# Altium PCB PCB3.PcbDoc
Units mil, origin at the board's own origin, x right, y up, seen from the top; angles counter-clockwise.
Board outline 6299.21 x 3937.01 mil, 2 copper layers (Top Layer, Bottom Layer); 132 components, 60 nets, 370 pads, 0 vias.
Unrouted connection lines stored in the file: 188.
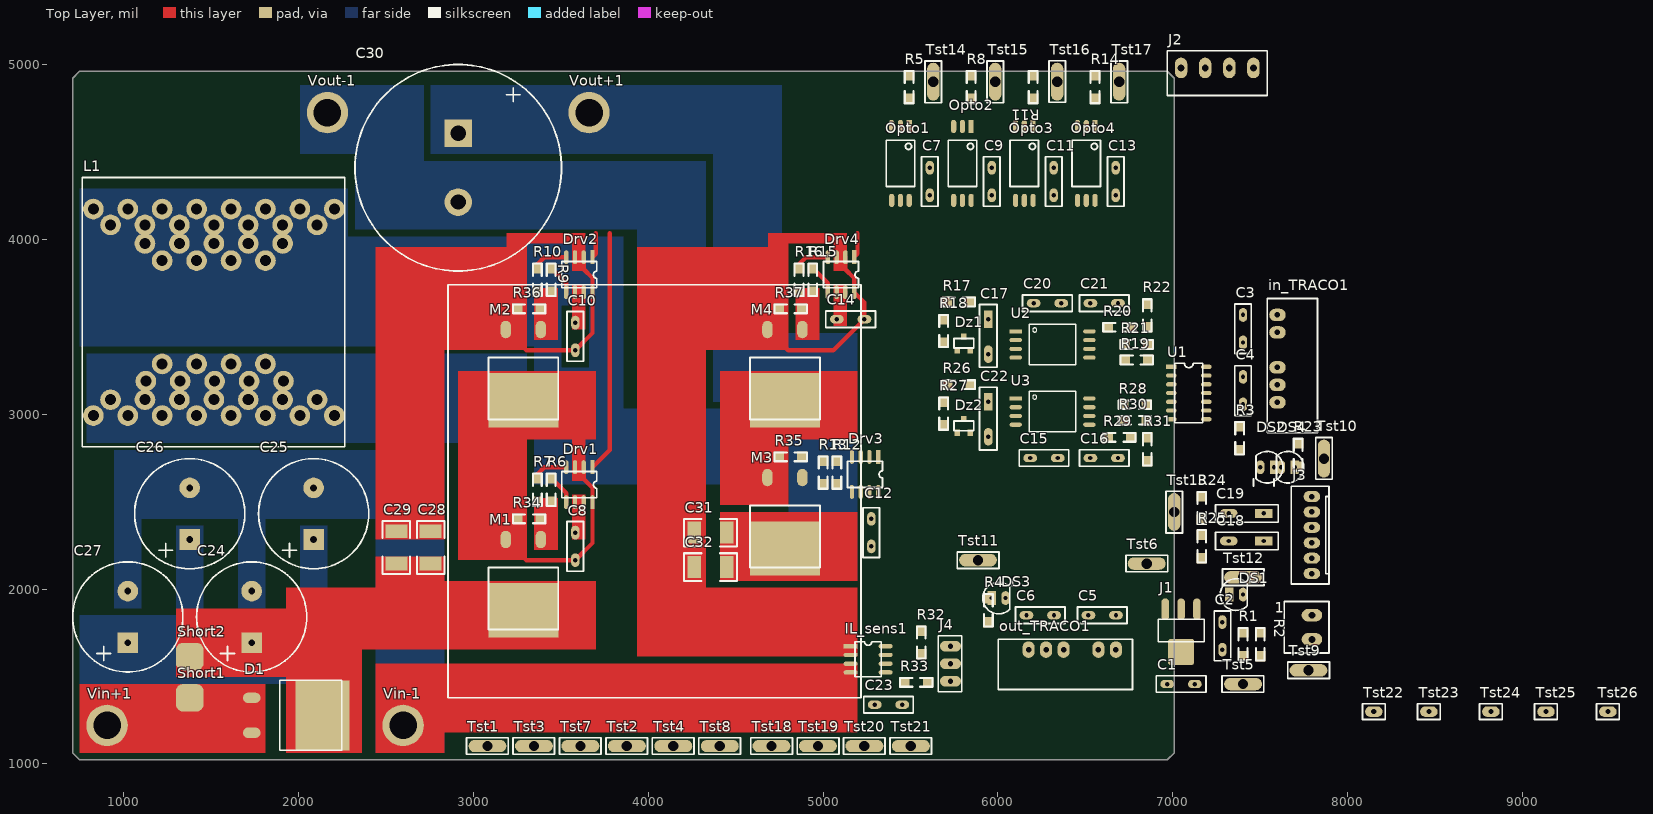
[diagram p0: Top Layer view]
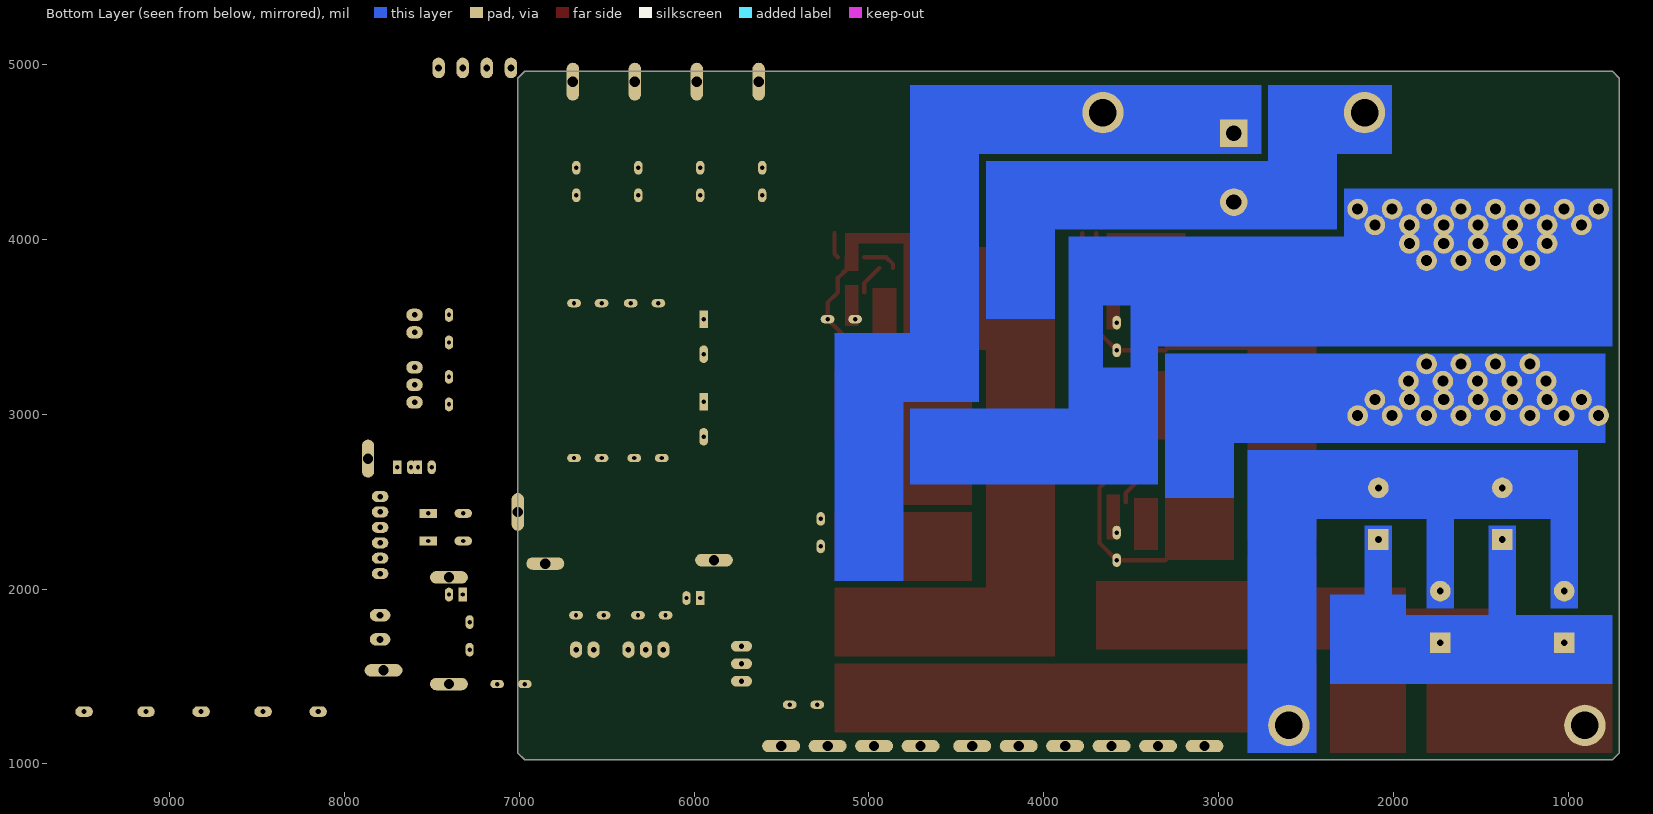
[diagram p1: Bottom Layer view, seen from below]

## Layer stack, top to bottom
Top Solder: solder mask 0.4, Solder Resist, Dk 3.5
Top Layer: signal copper 1.4
Dielectric 1: dielectric 12.6, FR-4, Dk 4.8
Bottom Layer: signal copper 1.4
Bottom Solder: solder mask 0.4, Solder Resist, Dk 3.5

## Board outline
708.66,4921.26 748.03,4960.63 6968.5,4960.63 7007.87,4921.26 7007.87,1062.99 6968.5,1023.62 748.03,1023.62 708.66,1062.99

## Design rules (kind name [scope] priority, off if disabled: settings)
Clearance "Polygon Pour" [InPolygon] p1: gap=78.74
Clearance Defoult [InNet('No Net') And OnLayer('Top Layer')] p2: gap=10
PolygonConnect [All] p1: connectstyle=Relief reliefconductorwidth=7.87 reliefentries=4 polygonreliefangle="90 Angle" airgapwidth=10
RoutingVias [All] p1: holewidth=28 width=50 viastyle="Through Hole" minholewidth=28 minwidth=50 maxholewidth=28 maxwidth=50
SolderMaskExpansion [All] p1: expansion=4
Width [All] p1: maxlimit=393.7 minlimit=11.81 preferedwidth=23.62
30 further rules are at their usual default settings.

## Classes and differential pairs
component class Switches: C24 C25 C26 C28 C29 C30 C31 C32 D1 L1 M1 M2 M3 M4 R34 R35 R36 R37 Short1 Short2 Vin+1 Vin-1 Vout+1 Vout-1
component class Power_supplies: 1 C1 C2 C3 C4 C5 C6 DS1 DS2 DS3 in_TRACO1 J1 out_TRACO1 R1 R2 R3 R4 Tst1 Tst2 Tst3 Tst4 Tst5 Tst6 Tst7 Tst8 Tst9 Tst10 Tst11 Tst12 Tst13
component class Drivers: C7 C8 C9 C10 C11 C12 C13 C14 C? Drv1 Drv2 Drv3 Drv4 IC? J2 Opto1 Opto2 Opto3 Opto4 R5 R6 R7 R8 R9 R10 R11 R12 R13 R14 R15 R16 Tst14 Tst15 Tst16 Tst17 Tst18 Tst19 Tst20 Tst21
component class Signal_processing: B? C15 C16 C17 C18 C19 C20 C21 C22 C23 DS4 Dz1 Dz2 IL_sens1 J3 J4 R17 R18 R19 R20 R21 R22 R23 R24 R25 R26 R27 R28 R29 R30 R31 R32 R33 Tst22 Tst23 Tst24 Tst25 Tst26 U1 U2 U3 U?

## Components (designator, comment, footprint, x,y, rotation, side; value= is the part's Value field where it differs from the comment)
1 "Cleva 2 vias" "CON2_EXTRON _3.5MMPITCH" 7795.28,1850.39 r270 top
C1 "100nF" CAP100NF_AAU 7125.98,1456.69 r180 top
C2 "100nF" CAP100NF_AAU 7283.46,1653.54 r90 top
C3 "100nF" CAP100NF_AAU 7401.57,3410.24 r90 top
C4 "100nF" CAP100NF_AAU 7401.57,3055.91 r90 top
C5 "100nF" CAP100NF_AAU 6517.32,1850.39 r0 top
C6 "100nF" CAP100NF_AAU 6162.99,1850.39 r0 top
C7 "100nF" CAP100NF_AAU 5610.24,4251.97 r90 top
C8 "100nF" CAP100NF_AAU 3582.68,2165.35 r90 top
C9 "100nF" CAP100NF_AAU 5964.57,4251.97 r90 top
C10 "100nF" CAP100NF_AAU 3582.68,3366.14 r90 top
C11 "100nF" CAP100NF_AAU 6318.9,4251.97 r90 top
C12 "100nF" CAP100NF_AAU 5275.59,2244.09 r90 top
C13 "100nF" CAP100NF_AAU 6673.23,4251.97 r90 top
C14 "100nF" CAP100NF_AAU 5236.22,3543.31 r180 top
C15 "100nF" CAP100NF_AAU 6341.73,2749.21 r180 top
C16 "100nF" CAP100NF_AAU 6686.22,2749.21 r180 top
C17 "66nF" "CONDENSADOR_MKP_200MILIS - DUPLICATE" 5944.88,3543.31 r270 top
C18 "4.7nF" "CONDENSADOR_MKP_200MILIS - DUPLICATE" 7519.69,2275.2 r180 top
C19 "470pF" "CONDENSADOR_MKP_200MILIS - DUPLICATE" 7519.69,2432.68 r180 top
C20 "100nF" CAP100NF_AAU 6361.42,3635.04 r180 top
C21 "100nF" CAP100NF_AAU 6686.22,3635.04 r180 top
C22 "27nF" "CONDENSADOR_MKP_200MILIS - DUPLICATE" 5944.88,3070.87 r270 top
C23 "100nF" CAP100NF_AAU 5452.76,1338.58 r180 top
C24 "470µF" CE_16DX35MM_PITCH7.5MM 1732.28,1692.91 r90 top
C25 "470µF" CE_16DX35MM_PITCH7.5MM 2086.61,2283.46 r90 top
C26 "470µF" CE_16DX35MM_PITCH7.5MM 1377.95,2283.46 r90 top
C27 "470µF" CE_16DX35MM_PITCH7.5MM 1023.62,1692.91 r90 top
C28 "100nF" 1812 2755.91,2145.67 r90 top
C29 "1uF" 1812 2559.06,2145.67 r90 top
C30 "820µF" CE_30DX35MM_PITCH10MM 2913.39,4606.3 r270 top
C31 "100nF" 1812 4448.82,2322.83 r180 top
C32 "1uF" 1812 4448.82,2125.98 r180 top
D1 "????" "D2PAK - DIODE" 1732.28,1377.95 r270 top
Drv1 "NCP81074A" NCP81074A 3681.1,2696.85 r270 top
Drv2 "NCP81074A" NCP81074A 3681.1,3897.64 r270 top
Drv3 "NCP81074A" NCP81074A 5314.96,2755.91 r270 top
Drv4 "NCP81074A" NCP81074A 5177.17,3897.64 r270 top
DS1 "Verde" "LED 2MM" 7401.57,1968.5 r270 top
DS2 "Verde" "LED 2MM" 7500,2696.85 r90 top
DS3 "Verde" "LED 2MM" 6043.31,1948.82 r270 top
DS4 "Verde" "LED 2MM" 7618.11,2696.85 r90 top
Dz1 "4.7V" "SOT23 - ZENNER" 5767.72,3366.14 r0 top
Dz2 "4.7V" "SOT23 - ZENNER" 5767.72,2893.7 r0 top
IL_sens1 "ACS723LLCTR-20AB-T" SOIC8_GND 5157.48,1673.23 r0 top
in_TRACO1 "TRACO" TRACO_TMA1212S 7598.43,3567.72 r270 top
J1 "LD1117" SOT-223_LM1117 7047.24,1762.44 r180 top
J2 "CON4" "CON4_EXTRON _3.5MMPITCH" 7047.24,4980.31 r0 top
J3 "CON6" ? 7795.28,2088.19 r90 top
J4 "Cleva 2 vias" CON_3_100MILIS 5728.35,1673.23 r0 top
L1 "mH" GENERAL_E_COIL 826.77,2992.13 r90 top
M1 "MOSFET N" "D2PAK - MOSFET" 3385.83,2283.46 r180 top
M2 "MOSFET N" "D2PAK - MOSFET" 3385.83,3484.25 r180 top
M3 "MOSFET N" "D2PAK - MOSFET" 4881.89,2637.8 r180 top
M4 "MOSFET N" "D2PAK - MOSFET" 4881.89,3484.25 r180 top
Opto1 "ACPL-W70L" SSOIC6 5492.13,4645.67 r270 top
Opto2 "ACPL-W70L" SSOIC6 5846.46,4645.67 r270 top
Opto3 "ACPL-W70L" SSOIC6 6200.79,4645.67 r270 top
Opto4 "ACPL-W70L" SSOIC6 6555.12,4645.67 r270 top
out_TRACO1 "TRACO" TRACO_TMA1212S 6674.8,1653.54 r180 top
R1 "RK" 1206 7401.57,1751.97 r270 top
R2 "Res. Bridge" 1206 7500,1751.97 r270 top
R3 "RK" 1206 7381.89,2795.28 r90 top
R4 "RK" 1206 5944.88,1811.02 r90 top
R5 "560OHM" 1206 5492.13,4803.15 r90 top
R6 "25" 1206 3444.88,2500 r90 top
R7 "560OHM" 1206 3366.14,2500 r90 top
R8 "560OHM" 1206 5846.46,4803.15 r90 top
R9 "560OHM" 1206 3444.88,3700.79 r90 top
R10 "560OHM" 1206 3366.14,3700.79 r90 top
R11 "560OHM" 1206 6200.79,4803.15 r90 top
R12 "560OHM" 1206 5078.74,2598.43 r90 top
R13 "560OHM" 1206 5000,2598.43 r90 top
R14 "560OHM" 1206 6555.12,4803.15 r90 top
R15 "560OHM" 1206 4940.94,3700.79 r90 top
R16 "560OHM" 1206 4862.2,3700.79 r90 top
R17 "47k" 1206 5708.66,3641.73 r0 top
R18 "2k" 1206 5688.98,3543.31 r270 top
R19 "11k" 1206 6725.59,3310.24 r0 top
R20 "11k" 1206 6627.17,3497.24 r0 top
R21 "27k" 1206 6860.43,3398.82 r180 top
R22 "27k" 1206 6853.54,3497.24 r90 top
R23 "RK" 1206 7716.54,2834.65 r270 top
R24 "6k8" 1206 7165.35,2531.1 r270 top
R25 "680k" 1206 7165.35,2176.77 r90 top
R26 "120k" 1206 5708.66,3169.29 r0 top
R27 "2k" 1206 5688.98,3070.87 r270 top
R28 "11k" 1206 6715.75,3054.33 r0 top
R29 "11k" 1206 6627.17,2867.32 r0 top
R30 "27k" 1206 6850.59,2965.75 r180 top
R31 "27k" 1206 6853.54,2867.32 r270 top
R32 "10k" 1206 5561.02,1761.81 r270 top
R33 "10k" 1206 5600.39,1466.54 r180 top
R34 "68K" 1206 3385.83,2401.57 r180 top
R35 "68K" 1206 4881.89,2755.91 r180 top
R36 "68K" 1206 3385.83,3602.36 r180 top
R37 "68K" 1206 4881.89,3602.36 r180 top
Short1 "CON1" SHORTPAD 1377.95,1377.95 r90 top
Short2 "CON1" SHORTPAD 1377.95,1614.17 r90 top
Tst1 "Test Point" TEST_POINT 3080.71,1102.36 r90 top
Tst2 "Test Point" TEST_POINT 3877.95,1102.36 r90 top
Tst3 "Test Point" TEST_POINT 3346.46,1102.36 r90 top
Tst4 "Test Point" TEST_POINT 4143.7,1102.36 r90 top
Tst5 "Test Point" TEST_POINT 7401.57,1456.69 r90 top
Tst6 "Test Point" TEST_POINT 6850.39,2145.67 r270 top
Tst7 "Test Point" TEST_POINT 3612.2,1102.36 r90 top
Tst8 "Test Point" TEST_POINT 4409.45,1102.36 r90 top
Tst9 "Test Point" TEST_POINT 7775.59,1535.43 r270 top
Tst10 "Test Point" TEST_POINT 7864.17,2746.06 r0 top
Tst11 "Test Point" TEST_POINT 5885.83,2165.35 r270 top
Tst12 "Test Point" TEST_POINT 7401.57,2066.93 r270 top
Tst13 "Test Point" TEST_POINT 7007.87,2440.94 r180 top
Tst14 "Test Point" TEST_POINT 5629.92,4901.57 r180 top
Tst15 "Test Point" TEST_POINT 5984.25,4901.57 r180 top
Tst16 "Test Point" TEST_POINT 6338.58,4901.57 r0 top
Tst17 "Test Point" TEST_POINT 6692.91,4901.57 r180 top
Tst18 "Test Point" TEST_POINT 4704.72,1102.36 r270 top
Tst19 "Test Point" TEST_POINT 4970.47,1102.36 r270 top
Tst20 "Test Point" TEST_POINT 5236.22,1102.36 r90 top
Tst21 "Test Point" TEST_POINT 5501.97,1102.36 r90 top
Tst22 "Test Point" CON_1_VIA 8149.61,1299.21 r90 top
Tst23 "Test Point" CON_1_VIA 8464.57,1299.21 r90 top
Tst24 "Test Point" CON_1_VIA 8818.9,1299.21 r90 top
Tst25 "Test Point" CON_1_VIA 9133.86,1299.21 r90 top
Tst26 "Test Point" CON_1_VIA 9488.19,1299.21 r90 top
U1 "LMC6484IM" SOIC_14 6991.34,3270.87 r0 top
U2 "ACPL-C870-000E" SSOP8 6312.2,3398.82 r0 top
U3 "ACPL-C870-000E" SSOP8 6312.2,3014.96 r0 top
Vin+1 "CON1" POWERHOLE 905.51,1220.47 r0 top
Vin-1 "CON1" POWERHOLE 2598.43,1220.47 r0 top
Vout+1 "CON1" POWERHOLE 3661.42,4724.41 r0 top
Vout-1 "CON1" POWERHOLE 2165.35,4724.41 r0 top

## Footprints (in the part's own frame and the unit in brackets; to place one, negate y for a bottom-side part, rotate by r counter-clockwise, add the part's x,y. Pads: shape width x height; smd on the part's side, far side on the other; paste and mask are expansions set on the pad)
1206 [mil] "SMD R&C"
  rect 60x60 smd: 1(0,0) 2(135,0)
  silkscreen extent -25,-25 160,25, body extent 2,-31 128,31
1812 [mm]
  rect 2x3.2 smd: 1(0,0) 2(4.7,0)
  silkscreen extent -1.5,-2 6.2,2
CAP100NF_AAU [mm] "10nF 1600v"
  oval 2x1.2 hole 0.635: 1(0,0) 2(4,0)
  silkscreen extent -1.6,-1.2 5.6,1.2
CE_16DX35MM_PITCH7.5MM [mm]
  rect 3x3 hole 1: 1(0,0)
  round 3 hole 1: 2(7.5,0)
  silkscreen extent -4.25,-8 11.75,8
CE_30DX35MM_PITCH10MM [mm]
  rect 4x4 hole 2.2: 1(0,0)
  round 4 hole 2.2: 2(10,0)
  silkscreen extent -10,-15 20,15
"CON2_EXTRON _3.5MMPITCH" [mm]
  oval 1.8x3 hole 1: 1(0,0) 2(3.5,0)
  silkscreen extent -2,-4 5.5,2.5
"CON4_EXTRON _3.5MMPITCH" [mm]
  oval 1.8x3 hole 1: 1(0,0) 2(3.5,0) 3(7,0) 4(10.5,0)
  silkscreen extent -2,-4 12.5,2.5
CON_1_VIA [mil]
  oval 60x100 hole 30: 1(0,0)
  silkscreen extent -45,-65 45,65
CON_3_100MILIS [mil]
  oval 120x60 hole 29.53: 1(0,0) 2(0,-100) 3(0,-200)
  silkscreen extent -70,-260 65,60
"CONDENSADOR_MKP_200MILIS - DUPLICATE" [mil] "10nF 1600v"
  rect 100x50 hole 25: 1(0,0)
  oval 100x50 hole 25: 2(200,0)
  silkscreen extent -84,-50 275,50
"D2PAK - DIODE" [mil] "TO220-superficie"
  oval 60x100 smd: A(0,0) A(200,0)
  rect 400x310 smd: K(100,405)
  silkscreen extent -100,160 300,515
"D2PAK - MOSFET" [mil] "TO220-superficie"
  rect 400x310 smd: D(100,405)
  oval 60x100 smd: G(0,0) S(200,0)
  silkscreen extent -100,160 300,515
GENERAL_E_COIL [mm] "For unknown shape. Max 40mm"
  round 3 hole 1.6: 1(0,0) 1(0,-5) 1(0,-10) 1(0,-15) 1(0,-20) 1(0,-25) 1(0,-30) 1(0,-35) 1(2.3,-2.5) 1(2.3,-7.5) 1(2.3,-12.5) 1(2.3,-17.5) 1(2.3,-22.5) 1(2.3,-27.5) 1(2.3,-32.5) 1(5,-17.62) 1(5,-12.62) 1(5,-7.62) 1(5,-27.62) 1(5,-22.62) 1(7.5,-10) 1(7.5,-25) 1(7.5,-20) 1(7.5,-15) 6(22.5,-20) 6(22.5,-15) 6(22.5,-10) 6(22.5,-25) 6(25,-22.5) 6(25,-17.5) 6(25,-12.5) 6(25,-7.5) 6(25,-27.5) 6(27.7,-32.5) 6(27.7,-27.5) 6(27.7,-22.5) 6(27.7,-17.5) 6(27.7,-12.5) 6(27.7,-7.5) 6(27.7,-2.5) 6(30,-35) 6(30,-30) 6(30,-25) 6(30,-20) 6(30,-15) 6(30,-10) 6(30,-5) 6(30,0)
  silkscreen extent -4.52,-36.53 34.59,1.6
"LED 2MM" [mm] "no está modificado"
  rect 2x1.2 hole 0.6: A(0,-2)
  oval 2x1.2 hole 0.6: K(0,0)
  silkscreen extent -2.72,-3.3 2.3,1
NCP81074A [mil] "Driver"
  rect 80x25 smd: 1(0,0)
  oval 80x25 smd: 2(0,-50) 3(0,-100) 4(0,-150) 5(200,-150) 6(200,-100) 7(200,-50) 8(200,0)
  silkscreen extent 25,-175 175,25
POWERHOLE [mm]
  round 6 hole 4: 1(0,0)
SHORTPAD [mm]
  rrect50% 4x4 smd: 1(0,0)
SOIC8_GND [mil] "Con plano de masa inferior"
  rect 80x25 smd: 1(0,0)
  oval 80x25 smd: 2(0,-50) 3(0,-100) 4(0,-150) 5(200,-150) 6(200,-100) 7(200,-50) 8(200,0)
  silkscreen extent 25,-175 175,25
SOIC_14 [mil]
  rect 60x24 smd: 1(0,0)
  oval 60x24 smd: 2(0,-50) 3(0,-100) 4(0,-150) 5(0,-200) 6(0,-250) 7(0,-300) 8(200,-300) 9(200,-250) 10(200,-200) 11(200,-150) 12(200,-100) 13(200,-50) 14(200,0)
  silkscreen extent 20,-320 180,20
"SOT23 - ZENNER" [mm] "Transistor SMD"
  rect 0.8x0.9 smd: A(0,0) K(0.95,2) NC(1.9,0)
  silkscreen extent -0.5,0.3 2.4,1.7
SOT-223_LM1117 [mm] "SOT-223/SC-73; 4 Leads; Body 6.7 x 7.3 mm, inc. leads (LxW max)"
  oval 1.1x3.15 smd: 1(-2.3,-3.1) 2(0,-3.1) 3(2.3,-3.1)
  rrect20% 3.8x3.8 smd: ""(0,3.1)
  silkscreen extent -3.35,-1.63 3.35,1.63
SSOIC6 [mm] "Circuito de 6 patas SMD"
  rect 1.91x0.762 smd: 1(0,0)
  oval 1.91x0.762 smd: 2(0,-1.27) 3(0,-2.54) 4(10.74,-2.54) 5(10.74,-1.27) 6(10.74,0)
  silkscreen extent 2,-3.34 8.74,0.8
SSOP8 [mm]
  rect 1.8x0.6 smd: 1(-5.35,1.905)
  oval 1.8x0.6 smd: 2(-5.35,0.635) 3(-5.35,-0.635) 4(-5.35,-1.905) 5(5.35,-1.905) 6(5.35,-0.635) 7(5.35,0.635) 8(5.35,1.905)
  silkscreen extent -3.4,-2.93 3.4,2.93
TEST_POINT [mm]
  oval 1.8x5.5 hole 1.5: 1(0,0)
  silkscreen extent -1.2,-3 1.2,3.05
TRACO_TMA1212S [mm]
  oval 1.8x2.4 hole 0.8: 1(0,0) 2(2.54,0) 4(7.62,0) 5(10.16,0) 6(12.7,0)
  silkscreen extent -2.4,-1.5 17.1,5.8
? [mm]
  oval 1.6x2.4 hole 0.8: 1(0,0) 2(2.24,0) 3(4.48,0) 4(6.72,0) 5(8.96,0) 6(11.2,0)
  silkscreen extent -1.5,-2.5 12.7,3

## Part data
1: library part Con_2
C1 C2 C3 C4 C5 C6 C7 C8 C9 C10 C11 C12 C13 C14 C15 C16 C17 C18 C19 C20 C21 C22 C23 C28 C29 C31 C32: library part Condensador, "Condensador"
C24 C25 C26 C27 C30: library part Cond_Electrolítico, "Condensador Aluminio con polaridad"
D1: library part Diodo, "Diodo"
DS1 DS2 DS3 DS4: library part Led
Dz1 Dz2: library part Zener
IL_sens1: "Current Sensor AC/DC 5V 8-Pin SOIC N Allegro Microsystems ACS723LLCTR-20AB-T, Current Sensor, 8-Pin, SOIC"
in_TRACO1 out_TRACO1: "TracoPower TMA1212S"
J1: "Linear voltage regulator"
J3: "CONECTOR 6 PINES"
J4: library part Con_3
L1: library part Bobina
M1 M2 M3 M4: "MOSFET de canal N"
R1 R3 R4 R5 R6 R7 R8 R9 R10 R11 R12 R13 R14 R15 R16 R17 R18 R19 R20 R21 R22 R23 R24 R25 R26 R27 R28 R29 R30 R31 R32 R33 R34 R35 R36 R37: library part Resistencia, "Resistencia"
R2: "Resistencia Bridge"
U1: library part LMC6484IM_1, "14 pin CMOS Quad Rail to Rail Input and Output Operational Amplifier 55 per tube"
U2 U3: "Isolation Amplifier [Broadcom] ACPL-C870-000E Isolation Amplifier"

## Nets (pads, with @x,y where several pads share a name; then routed paths per layer and width w, separated by ;. In a path a pad name is that pad's centre, name@x,y a point inside that pad or via, vN(x,y) a via of type N, cw(c..) or ccw(c..) an arc to the next point about the centre after c; other vN are vias at no path point)
5V_HV: C2.2 C15.2 C20.2 DS1.A J1.2 Tst12.1 U2.1 U3.1
5V_LV: C16.2 C21.2 C23.2 DS4.A IL_sens1.8 J3.6 J4.1 Tst13.1 U1.4 U2.8 U3.8
12V_HV_HS_IN: C4.1 C7.1 C8.2 Drv1.6 Drv1.7 DS2.A in_TRACO1.6 Opto1.6 Tst10.1 | length 219.3
  Top Layer w25: C8.2 3582.68,2495.28 Drv1.7@3629.53,2495.28
12V_HV_HS_OUT: C6.1 C11.1 C12.2 Drv3.6 Drv3.7 DS3.A Opto3.6 out_TRACO1.6 Tst11.1
12V_HV_LS: 1.2 C1.2 C3.2 C5.2 C9.1 C10.2 C13.1 C14.2 Drv2.6 Drv2.7 Drv4.6 Drv4.7 in_TRACO1.1 J1.3 Opto2.6 Opto4.6 out_TRACO1.1 Tst9.1 | length 438.6
  Top Layer w25: C10.2 3582.68,3696.06 Drv2.7@3629.53,3696.06 ; C14.2@5078.74,3523.62 5078.74,3696.06 Drv4.7@5125.59,3696.06
GND_HV_HS_IN: C4.2 C7.2 C8.1 Drv1.2 Drv1.3 Drv1.8 in_TRACO1.4 L1.1 M1.S M2.D Opto1.4 R3.2 R34.2 Tst3.1 | length 1088.7
  Top Layer w25: M1.S 3303.94,2165.35 C8.1 3681.1,2263.78 Drv1.8 3681.1,2578.74 3631.1,2628.74 Drv1.2 Drv1.3
GND_HV_HS_OUT: C6.2 C11.2 C12.1 Drv3.2 Drv3.3 Drv3.8 L1.6 M3.S M4.D Opto3.4 out_TRACO1.4 R4.2 R35.2 Tst4.1
GND_HV_LS_IN: 1.1 C3.1 C5.1 C9.2 C10.1 C17.2 C24.2 C25.2 C26.2 C27.2 C28.2 C29.2 Drv2.2 Drv2.3 Drv2.8 Dz1.A IL_sens1.3 IL_sens1.4 in_TRACO1.2 M2.S Opto2.4 out_TRACO1.2 R2.1 R18.2 R36.2 Tst1.1 U2.3 Vin-1.1 | length 1088.7
  Top Layer w25: M2.S 3303.94,3366.14 C10.1 3681.1,3464.57 Drv2.8 3681.1,3779.53 3631.1,3829.53 Drv2.2 Drv2.3
GND_HV_LS_OUT: C13.2 C14.1 C22.2 C30.2 C31.2 C32.2 Drv4.2 Drv4.3 Drv4.8 Dz2.A IL_sens1.1 IL_sens1.2 M4.S Opto4.4 R27.2 R37.2 Tst2.1 U3.3 Vout-1.1 | length 1126.1
  Top Layer w25: M4.S 4800,3366.14 5059.06,3366.14 C14.1 5236.22,3638.58 Drv4.8 5177.17,3779.53 5127.17,3829.53 Drv4.2 Drv4.3
GND_HV_SENSORS: C1.1 C2.1 C15.1 C20.1 J1.1 R1.2 R2.2 Tst5.1 U2.4 U3.4
GND_LV: C16.1 C18.2 C19.2 C21.1 C23.1 IL_sens1.5 J3.4 J4.3 Opto1.3 Opto2.3 Opto3.3 Opto4.3 R21.2 R23.2 R30.2 R33.2 Tst6.1 U1.11 U1.12 U1.13 U2.5 U3.5
NetC18_1: C18.1 J3.3 R25.1 Tst25.1
NetC19_1: C19.1 J3.5 R24.1 Tst26.1
NetD1_A: D1.A Short1.1 Vin+1.1
NetDrv1_1: Drv1.1 Opto1.5 | length 1379.4
  Top Layer w25: Drv1.1 3779.53,2795.28 3779.53,4035.43
NetDrv1_4: Drv1.4 R7.2 | length 203.7
  Top Layer w25: R7.2 3366.14,2657.48 3405.51,2696.85 Drv1.4
NetDrv1_5: Drv1.5 R6.2 | length 173.9
  Top Layer w25: R6.2 3531.1,2548.78 Drv1.5
NetDrv2_1: Drv2.1 Opto2.5 | length 145.9
  Top Layer w25: Drv2.1 3700.79,3917.32 3700.79,4035.43
NetDrv2_4: Drv2.4 R10.2 | length 203.7
  Top Layer w25: R10.2 3366.14,3858.27 3405.51,3897.64 Drv2.4
NetDrv2_5: Drv2.5 R9.2 | length 173.9
  Top Layer w25: R9.2 3531.1,3749.57 Drv2.5
NetDrv3_1: Drv3.1 Opto3.5
NetDrv3_4: Drv3.4 R13.2
NetDrv3_5: Drv3.5 R12.2
NetDrv4_1: Drv4.1 Opto4.5 | length 145.9
  Top Layer w25: Drv4.1 5196.85,3917.32 5196.85,4035.43
NetDrv4_4: Drv4.4 R16.2 | length 203.7
  Top Layer w25: R16.2 4862.2,3858.27 4901.57,3897.64 Drv4.4
NetDrv4_5: Drv4.5 R15.2 | length 173.9
  Top Layer w25: R15.2 5027.17,3749.57 Drv4.5
NetDS1_K: DS1.K R1.1
NetDS2_K: DS2.K R3.1
NetDS3_K: DS3.K R4.1
NetDS4_K: DS4.K R23.1
NetIL_sens1_6: IL_sens1.6 J4.2
NetIL_sens1_7: IL_sens1.7 R32.2 R33.1
NetJ2_1: J2.1 R14.2 Tst17.1
NetJ2_2: J2.2 R11.2 Tst16.1
NetJ2_3: J2.3 R8.2 Tst15.1
NetJ2_4: J2.4 R5.2 Tst14.1
NetJ3_1: J3.1 R22.2 Tst22.1 U1.1
NetJ3_2: J3.2 R31.2 Tst23.1 U1.7
NetM1_G: M1.G R6.1 R7.1 R34.1 Tst18.1 | length 303.4
  Top Layer w25: M1.G R34.1 3385.83,2480.31 R7.1 R6.1
NetM2_G: M2.G R9.1 R10.1 R36.1 Tst19.1 | length 303.4
  Top Layer w25: M2.G R36.1 3385.83,3681.1 R10.1 R9.1
NetM3_G: M3.G R12.1 R13.1 R35.1 Tst20.1
NetM4_G: M4.G R15.1 R16.1 R37.1 Tst21.1 | length 303.4
  Top Layer w25: M4.G R37.1 4881.89,3681.1 R16.1 R15.1
NetOpto1_1: Opto1.1 R5.1
NetOpto2_1: Opto2.1 R8.1
NetOpto3_1: Opto3.1 R11.1
NetOpto4_1: Opto4.1 R14.1
NetR19_1: R19.1 U2.7
NetR19_2: R19.2 R21.1 U1.3
NetR20_1: R20.1 U2.6
NetR20_2: R20.2 R22.1 U1.2
NetR24_2: R24.2 R25.2 Tst24.1 U1.8 U1.9
NetR28_1: R28.1 U3.7
NetR28_2: R28.2 R30.1 U1.5
NetR29_1: R29.1 U3.6
NetR29_2: R29.2 R31.1 U1.6
NetR32_1: R32.1 U1.10
VIN: C24.1 C25.1 C26.1 C27.1 C28.1 C29.1 D1.K M1.D R17.1 Short2.1 Tst7.1
VIN_SEN: C17.1 Dz1.K R17.2 R18.1 U2.2
VOUT: C30.1 C31.1 C32.1 M3.D R26.1 Tst8.1 Vout+1.1
VOUT_SEN: C22.1 Dz2.K R26.2 R27.1 U3.2
pads on no net: Dz1.NC Dz2.NC in_TRACO1.5 J1. Opto1.2 Opto2.2 Opto3.2 Opto4.2 out_TRACO1.5 U1.14

## Other copper
Top Layer:
  rectangle net VOUT: 4409.45,2047.24 5196.85,2440.94
  rectangle net VIN: 1299.21,1496.06 2007.87,1889.76
  rectangle net VIN: 2283.46,1653.54 2519.68,2007.87
  rectangle net VIN: 1929.13,1062.99 2362.2,2007.87
  rectangle net VIN: 2795.28,1653.54 2952.76,2047.24
  rectangle net VIN: 2440.94,1653.54 2834.65,2185.04
  rectangle net VIN: 2913.39,1653.54 3700.79,2047.24
  rectangle net NetM4_G: 4842.52,3425.2 4980.31,3720.47
  rectangle net NetM2_G: 3346.46,3425.2 3484.25,3720.47
  rectangle net NetM1_G: 3346.46,2224.41 3484.25,2519.68
  rectangle net NetD1_A: 748.03,1062.99 1811.02,1456.69
  rectangle net GND_HV_LS_OUT: 4251.97,1614.17 5196.85,2007.87
  rectangle net GND_HV_LS_OUT: 4685.04,3917.32 4803.15,4035.43
  rectangle net GND_HV_LS_OUT: 4685.04,3976.38 5137.8,4035.43
  rectangle net GND_HV_LS_OUT: 5059.06,3818.9 5137.8,4035.43
  rectangle net GND_HV_LS_OUT: 4311.02,3366.14 4429.13,3956.69
  rectangle net GND_HV_LS_OUT: 3937.01,1614.17 4330.71,3956.69
  rectangle net GND_HV_LS_OUT: 4409.45,3366.14 4803.15,3956.69
  rectangle net GND_HV_LS_IN: 2440.94,1062.99 2834.65,1574.8
  rectangle net GND_HV_LS_IN: 2440.94,1181.1 5196.85,1574.8
  rectangle net GND_HV_LS_IN: 3188.98,3917.32 3307.09,4035.43
  rectangle net GND_HV_LS_IN: 3188.98,3976.38 3641.73,4035.43
  rectangle net GND_HV_LS_IN: 3562.99,3818.9 3641.73,4035.43
  rectangle net GND_HV_LS_IN: 2795.28,3366.14 2952.76,3956.69
  rectangle net GND_HV_LS_IN: 2440.94,2283.46 2834.65,3956.69
  rectangle net GND_HV_LS_IN: 2913.39,3366.14 3307.09,3956.69
  rectangle net GND_HV_HS_OUT: 4409.45,2736.22 4803.15,2893.7
  rectangle net GND_HV_HS_OUT: 4409.45,2854.33 5196.85,3248.03
  rectangle net GND_HV_HS_OUT: 4409.45,2480.32 4803.15,2755.91
  rectangle net GND_HV_HS_IN: 3562.99,2618.11 3641.73,2893.7
  rectangle net GND_HV_HS_IN: 2913.39,2716.54 3307.09,2893.7
  rectangle net GND_HV_HS_IN: 2913.39,2854.33 3700.79,3248.03
  rectangle net GND_HV_HS_IN: 2913.39,2165.35 3307.09,2755.91
  rectangle net 12V_HV_LS: 5059.06,3503.94 5137.8,3740.16
  rectangle net 12V_HV_LS: 3562.99,3484.25 3641.73,3740.16
  rectangle net 12V_HV_HS_IN: 3562.99,2283.46 3641.73,2539.37
Bottom Layer:
  rectangle net VOUT: 4370.08,3070.87 5196.85,3464.57
  rectangle net VOUT: 4803.15,2047.24 5196.85,3110.24
  rectangle net VOUT: 4370.08,3070.87 4763.78,4606.3
  rectangle net VOUT: 2755.91,4488.19 4763.78,4881.89
  rectangle net VIN: 1929.13,1456.69 2362.2,1968.5
  rectangle net VIN: 2007.87,1968.5 2165.35,2362.2
  rectangle net VIN: 1299.21,1850.39 1456.69,2362.2
  rectangle net VIN: 748.03,1456.69 2007.87,1850.39
  rectangle net GND_HV_LS_OUT: 2007.87,4488.19 2637.8,4881.89
  rectangle net GND_HV_LS_OUT: 2322.83,4055.12 2716.54,4881.89
  rectangle net GND_HV_LS_OUT: 3937.01,3543.31 4330.71,4448.82
  rectangle net GND_HV_LS_OUT: 2322.83,4055.12 3976.38,4448.82
  rectangle net GND_HV_LS_IN: 1299.21,2401.57 2834.65,2795.28
  rectangle net GND_HV_LS_IN: 944.88,2401.57 1377.95,2795.28
  rectangle net GND_HV_LS_IN: 944.88,1889.76 1102.36,2598.43
  rectangle net GND_HV_LS_IN: 1653.54,1889.76 1811.02,2559.06
  rectangle net GND_HV_HS_OUT: 3661.42,2952.76 3858.27,4015.75
  rectangle net GND_HV_HS_OUT: 3464.57,2992.13 3740.16,3267.72
  rectangle net GND_HV_HS_OUT: 3346.46,2598.43 3503.94,3425.2
  rectangle net GND_HV_HS_OUT: 3346.46,2598.43 4763.78,3031.5
  rectangle net GND_HV_HS_OUT: 3425.2,3622.05 3740.16,4015.75
  rectangle net GND_HV_HS_OUT: 2244.09,3385.83 3503.94,4015.75
  rectangle net GND_HV_HS_OUT: 748.03,3385.83 2283.46,4291.34
  rectangle net GND_HV_HS_IN: 2913.39,2519.68 3307.09,3070.87
  rectangle net GND_HV_HS_IN: 787.4,2834.65 3307.09,3346.46
  rectangle net GND_HV_LS_IN: 2440.94,1062.99 2834.65,2795.28

## Silkscreen, mask and mechanical layers (free items; w line width, h text height)
Top Overlay:
  lines w10: 2854.33,1377.95 5216.54,1377.95 5216.54,3740.16 2854.33,3740.16 2854.33,1377.95

## Dimensions
708.66,4921.26 to 7007.87,4921.26 on Mechanical 1
6968.5,4960.63 to 6968.5,1023.62 on Mechanical 1